# Allegro board MAYAPTRUNG.brd
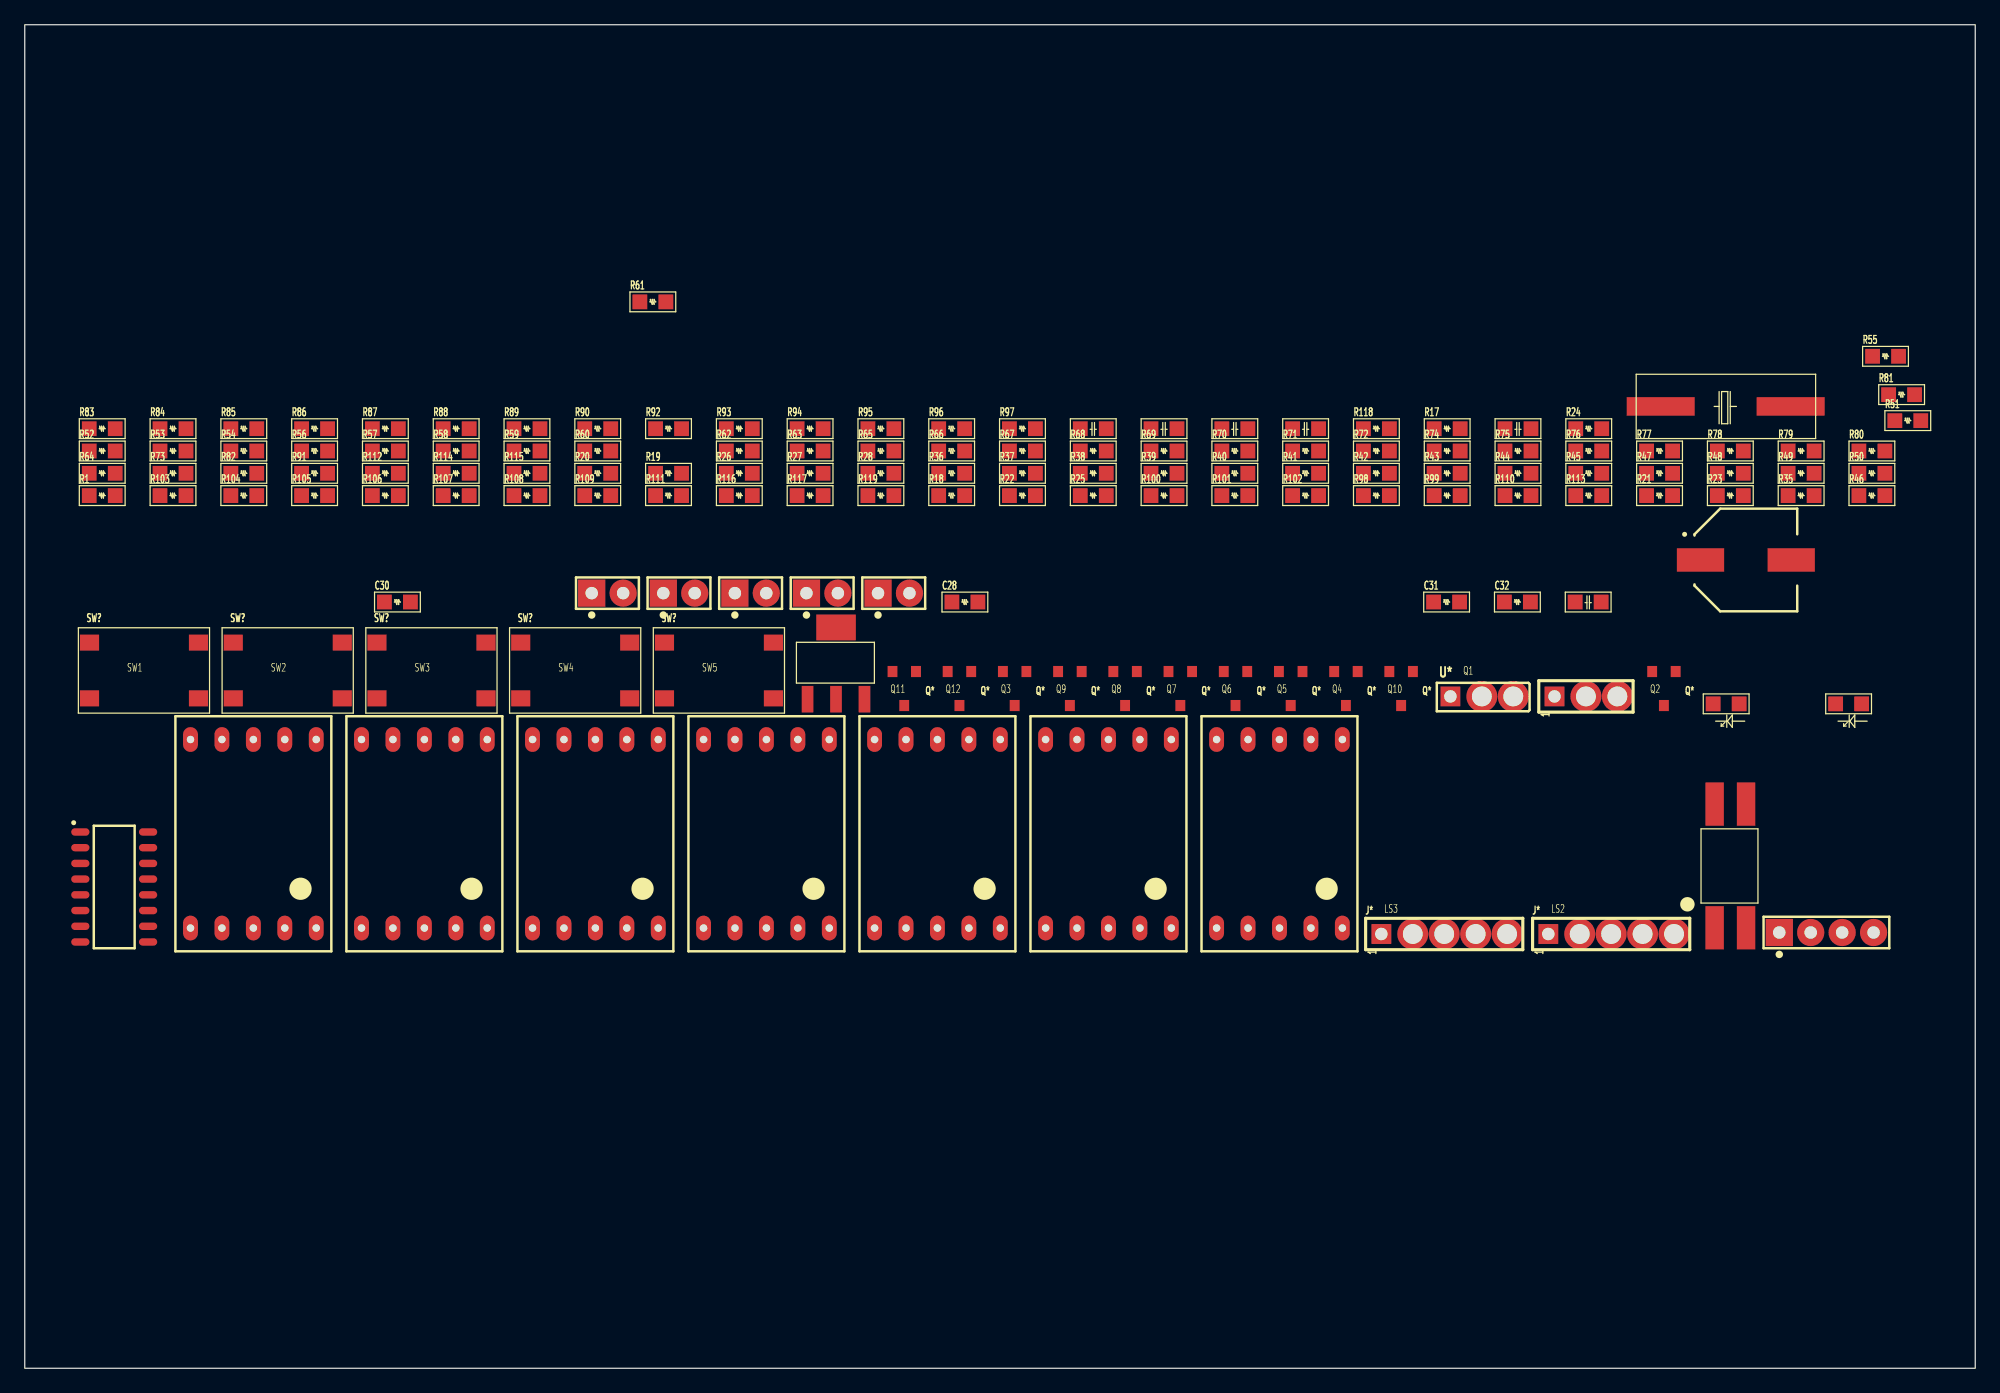
[diagram p0: board, top side]
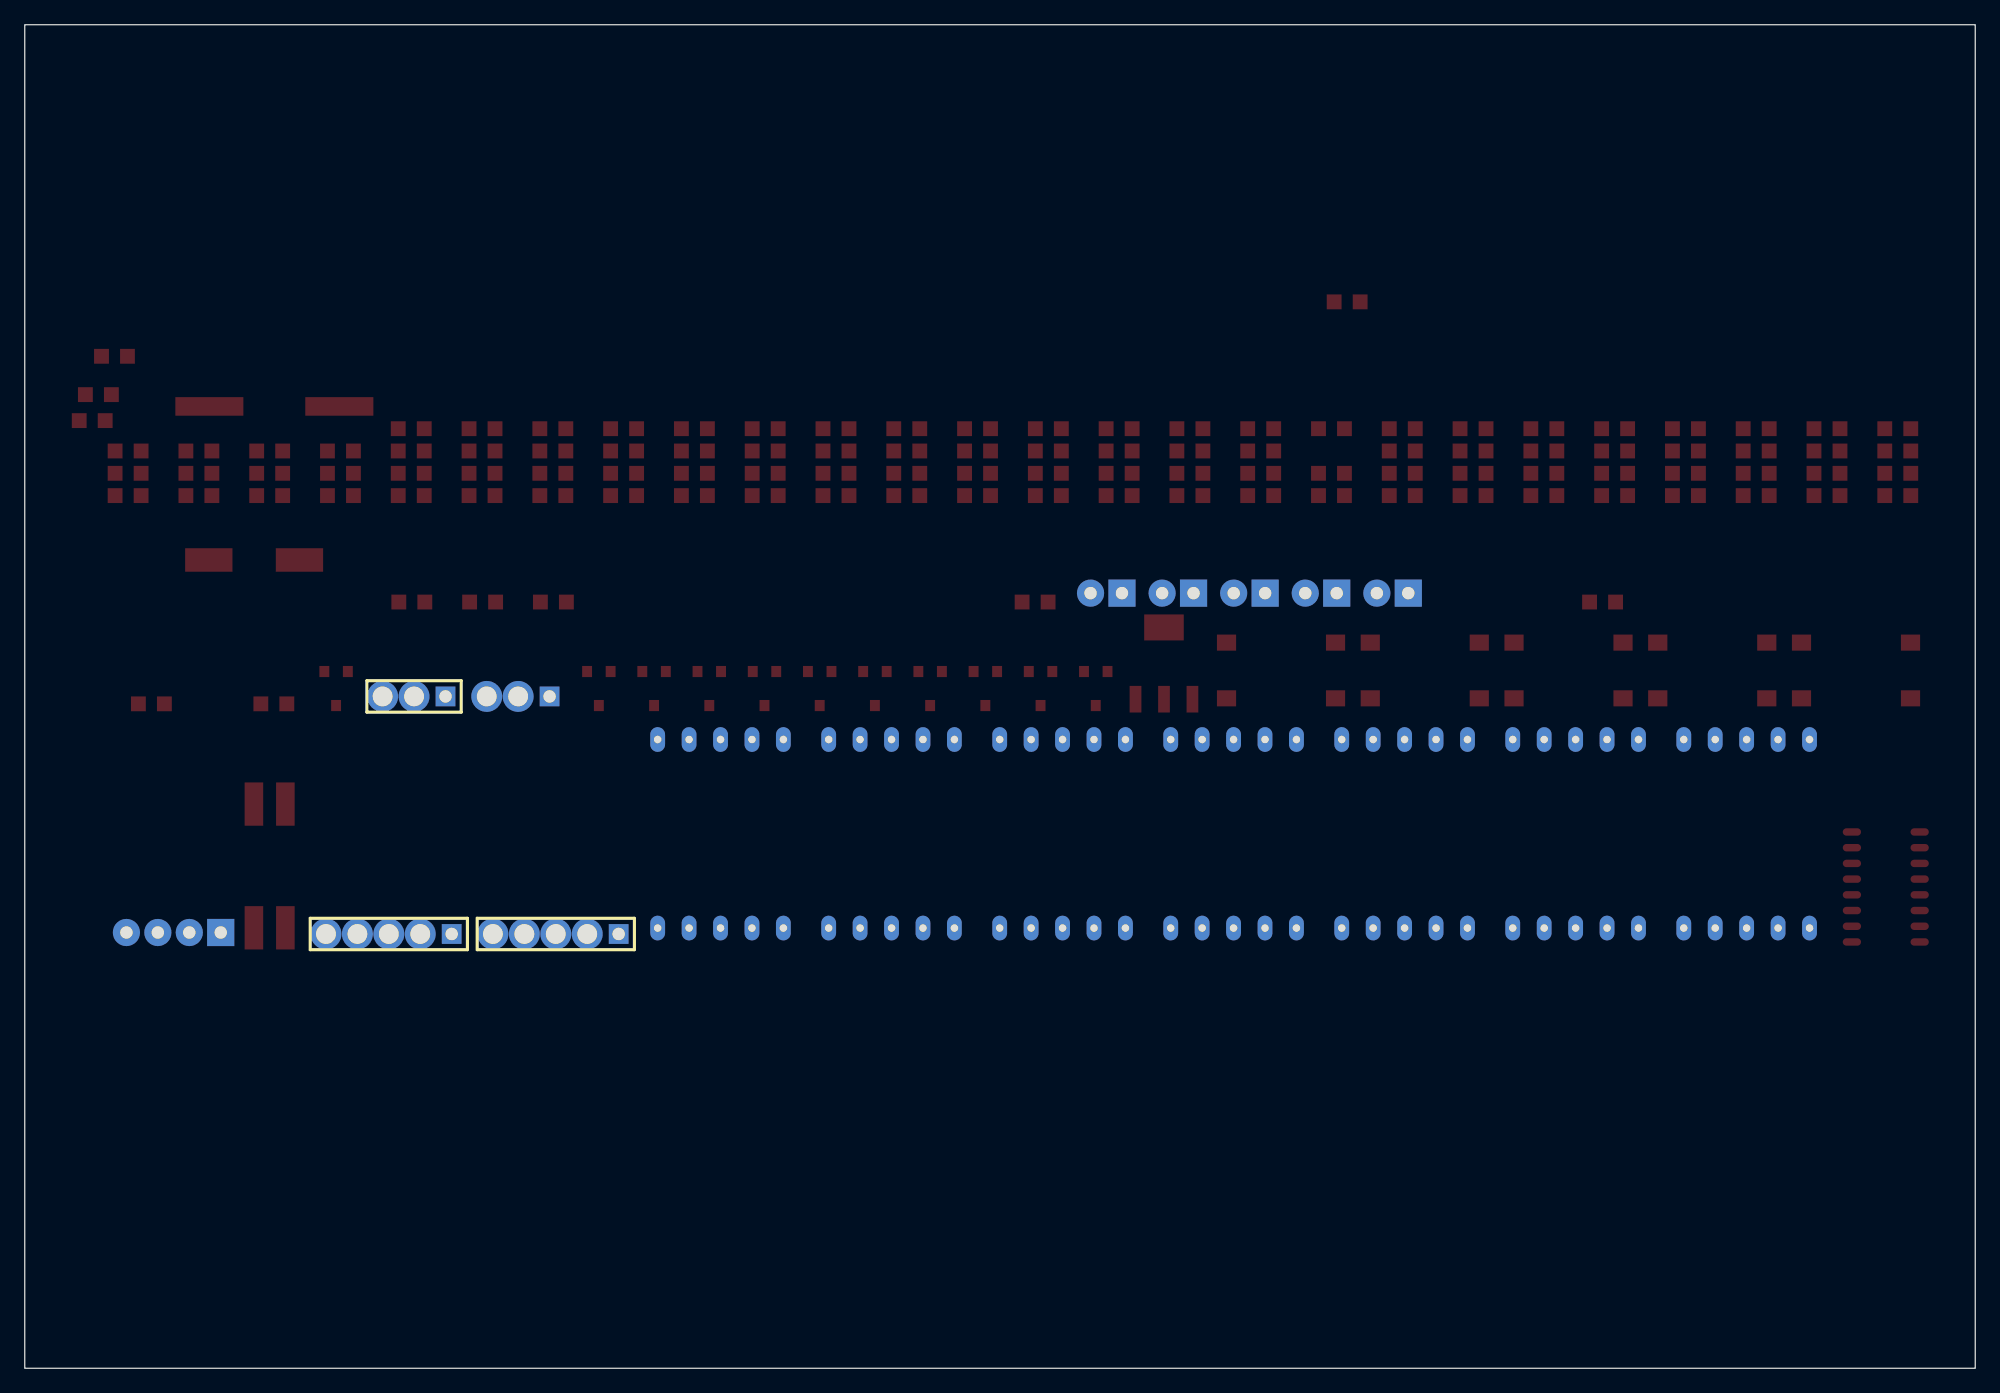
[diagram p1: board, bottom side, seen from below]

Outline 157.6 x 108.6 mm; copper layers: TOP, BOTTOM. Coordinates in mm from the lower left corner of the outline.
Outline path: rectangle 0,0 157.6,108.6

## Design rules (mm)
constraint set DEFAULT: min track width 0.127
net group @@UNNG[0]_164300: nets LED_BUTTON_GROPU.SEGMENT_LEDS.S LED_BUTTON_GROPU.SEGMENT_LEDS_1 LED_BUTTON_GROPU.SEGMENT_LEDS_2 LED_BUTTON_GROPU.SEGMENT_LEDS_3 LED_BUTTON_GROPU.SEGMENT_LEDS_4 LED_BUTTON_GROPU.SEGMENT_LEDS_5 LED_BUTTON_GROPU.SEGMENT_LEDS_6 LED_BUTTON_GROPU.SEGMENT_LEDS_7
net group @@UNNG[0]_168212: nets LED_BUTTON_GROPU.LEDS.LEDS0 LED_BUTTON_GROPU.LEDS.LEDS1 LED_BUTTON_GROPU.LEDS.LEDS2
net group @@UNNG[0]_170267: nets LED_BUTTON_GROPU.LEDS_EN.LEDS_1 LED_BUTTON_GROPU.LEDS_EN.LEDS_2 LED_BUTTON_GROPU.LEDS_EN.LEDS_E
net group LED_BUTTON_GROPU[0..18]: nets LED_BUTTON_GROPU.BUTTONS1 LED_BUTTON_GROPU.BUTTONS2 LED_BUTTON_GROPU.BUTTONS3
net group LED_BUTTON_GROUP[0..18]: nets LED_BUTTON_GROUP.BUTTONS0 LED_BUTTON_GROUP.BUTTONS1 LED_BUTTON_GROUP.BUTTONS2 LED_BUTTON_GROUP.BUTTONS3 LED_BUTTON_GROUP.BUTTONS4 LED_BUTTON_GROUP.LEDS.LEDS0 LED_BUTTON_GROUP.LEDS.LEDS1 LED_BUTTON_GROUP.LEDS.LEDS2 LED_BUTTON_GROUP.LEDS_EN.LEDS_1 LED_BUTTON_GROUP.LEDS_EN.LEDS_2 LED_BUTTON_GROUP.LEDS_EN.LEDS_E LED_BUTTON_GROUP.SEGMENT_LEDS.S LED_BUTTON_GROUP.SEGMENT_LEDS_1 LED_BUTTON_GROUP.SEGMENT_LEDS_2 LED_BUTTON_GROUP.SEGMENT_LEDS_3 LED_BUTTON_GROUP.SEGMENT_LEDS_4 LED_BUTTON_GROUP.SEGMENT_LEDS_5 LED_BUTTON_GROUP.SEGMENT_LEDS_6 LED_BUTTON_GROUP.SEGMENT_LEDS_7
net group POWER[0..5]: nets POWER.3V3 POWER.220V_L POWER.220V_N POWER.GND POWER.ZERO_DETECT_3V3

## Placement (name value [footprint] x y rotation side)
C1  10nF  [CAP_SMD_0805]  119.6 75.95 0 top
C7  1uF  [CAP_SMD_0805]  125.27 61.94 0 top
C20  20pF  [CAP_SMD_0805]  102.44 75.95 0 top
C21  20pF  [CAP_SMD_0805]  96.72 75.95 0 top
C22  100nF  [CAP_SMD_0805]  91 75.95 0 top
C28  0.47uF 250V  [RES_SMD_0805]  74.91 61.94 0 top
C29  470uF  [CAP_SMD_SIZEF]  139.07 65.34 0 top
C30  100nF  [RES_SMD_0805]  29.06 61.94 0 top
C31  100nF  [RES_SMD_0805]  113.84 61.94 0 top
C32  100nF  [RES_SMD_0805]  119.56 61.94 0 top
C33  100nF  [CAP_SMD_0805]  85.28 75.95 0 top
D4  LDS-HTA512RI  [LED7DOAN_14_22]  101.38 43.2 0 top
D9  LED  [LED_SMD_0805]  146.32 53.71 0 top
D11  LDS-HTA512RI  [LED7DOAN_14_22]  73.75 43.2 0 top
D12  LDS-HTA512RI  [LED7DOAN_14_22]  32.29 43.2 0 top
D13  LDS-HTA512RI  [LED7DOAN_14_22]  18.47 43.2 0 top
D14  LDS-HTA512RI  [LED7DOAN_14_22]  59.93 43.2 0 top
D15  LDS-HTA512RI  [LED7DOAN_14_22]  46.11 43.2 0 top
D16  LDS-HTA512RI  [LED7DOAN_14_22]  87.56 43.2 0 top
D19  LED  [LED_SMD_0805]  136.42 53.71 0 top
ISO1  OPTO ISOLATOR-A  [PC817_SMD]  136.54 35.6 0 top
J1  AC220V  [J1_2_254]  45.81 62.66 0 top
J2  SWIM  [J1_4_254]  141.77 35.22 0 top
J3  DHT11  [J1_3_254]  124.87 54.31 0 top
J4  COI BIP  [J1_2_254]  51.59 62.66 0 top
J5  DONG CO  [J1_2_254]  57.38 62.66 0 top
J6  PHUN SUONG  [J1_2_254]  63.16 62.66 0 top
J7  DEN DOT NONG  [J1_2_254]  68.94 62.66 0 top
LS2  RELAY SPDT  [J1_5_254]  124.37 35.1 0 top
LS3  RELAY SPDT  [J1_5_254]  110.88 35.1 0 top
Q1  BTA12  [TO220]  115.19 54.31 0 top
Q2  2SC1815  [SOT-23]  133.39 56.32 0 top
Q3  2SC1815  [SOT-23]  80.93 56.32 0 top
Q4  2SA1015  [SOT-23]  107.7 56.32 0 top
Q5  2SA1015  [SOT-23]  103.24 56.32 0 top
Q6  2SA1015  [SOT-23]  98.78 56.32 0 top
Q7  2SA1015  [SOT-23]  94.32 56.32 0 top
Q8  2SA1015  [SOT-23]  89.86 56.32 0 top
Q9  2SA1015  [SOT-23]  85.4 56.32 0 top
Q10  2SA1015  [SOT-23]  112.16 56.32 0 top
Q11  2SC1815  [SOT-23]  72.01 56.32 0 top
Q12  2SC1815  [SOT-23]  76.47 56.32 0 top
R1  10k  [RES_SMD_0805]  5.21 70.54 0 top
R17  1K  [RES_SMD_0805]  113.88 75.95 0 top
R18  10k  [RES_SMD_0805]  73.84 70.54 0 top
R19  470R  [RES_SMD_0805]  50.97 72.34 0 top
R20  100R  [RES_SMD_0805]  45.25 72.34 0 top
R21  1K  [RES_SMD_0805]  131.04 70.54 0 top
R22  10k  [RES_SMD_0805]  79.56 70.54 0 top
R23  1K  [RES_SMD_0805]  136.76 70.54 0 top
R24  1K  [RES_SMD_0805]  125.32 75.95 0 top
R25  10k  [RES_SMD_0805]  85.28 70.54 0 top
R26  220R  [RES_SMD_0805]  56.69 72.34 0 top
R27  220R  [RES_SMD_0805]  62.41 72.34 0 top
R28  220R  [RES_SMD_0805]  68.13 72.34 0 top
R35  1K  [RES_SMD_0805]  142.48 70.54 0 top
R36  330R  [RES_SMD_0805]  73.84 72.34 0 top
R37  330R  [RES_SMD_0805]  79.56 72.34 0 top
R38  330R  [RES_SMD_0805]  85.28 72.34 0 top
R39  330R  [RES_SMD_0805]  91 72.34 0 top
R40  330R  [RES_SMD_0805]  96.72 72.34 0 top
R41  330R  [RES_SMD_0805]  102.44 72.34 0 top
R42  330R  [RES_SMD_0805]  108.16 72.34 0 top
R43  330R  [RES_SMD_0805]  113.88 72.34 0 top
R44  330R  [RES_SMD_0805]  119.6 72.34 0 top
R45  330R  [RES_SMD_0805]  125.32 72.34 0 top
R46  1K  [RES_SMD_0805]  148.2 70.54 0 top
R47  330R  [RES_SMD_0805]  131.04 72.34 0 top
R48  330R  [RES_SMD_0805]  136.76 72.34 0 top
R49  330R  [RES_SMD_0805]  142.48 72.34 0 top
R50  330R  [RES_SMD_0805]  148.2 72.34 0 top
R51  330R  [RES_SMD_0805]  151.1 76.6 0 top
R52  330R  [RES_SMD_0805]  5.21 74.14 0 top
R53  330R  [RES_SMD_0805]  10.93 74.14 0 top
R54  330R  [RES_SMD_0805]  16.65 74.14 0 top
R55  1K  [RES_SMD_0805]  149.3 81.8 0 top
R56  330R  [RES_SMD_0805]  22.37 74.14 0 top
R57  330R  [RES_SMD_0805]  28.09 74.14 0 top
R58  330R  [RES_SMD_0805]  33.81 74.14 0 top
R59  330R  [RES_SMD_0805]  39.53 74.14 0 top
R60  330R  [RES_SMD_0805]  45.25 74.14 0 top
R61  330R  [RES_SMD_0805]  49.7 86.2 0 top
R62  330R  [RES_SMD_0805]  56.69 74.14 0 top
R63  330R  [RES_SMD_0805]  62.41 74.14 0 top
R64  1K  [RES_SMD_0805]  5.21 72.34 0 top
R65  330R  [RES_SMD_0805]  68.13 74.14 0 top
R66  330R  [RES_SMD_0805]  73.84 74.14 0 top
R67  330R  [RES_SMD_0805]  79.56 74.14 0 top
R68  330R  [RES_SMD_0805]  85.28 74.14 0 top
R69  330R  [RES_SMD_0805]  91 74.14 0 top
R70  330R  [RES_SMD_0805]  96.72 74.14 0 top
R71  330R  [RES_SMD_0805]  102.44 74.14 0 top
R72  330R  [RES_SMD_0805]  108.16 74.14 0 top
R73  1K  [RES_SMD_0805]  10.93 72.34 0 top
R74  330R  [RES_SMD_0805]  113.88 74.14 0 top
R75  330R  [RES_SMD_0805]  119.6 74.14 0 top
R76  330R  [RES_SMD_0805]  125.32 74.14 0 top
R77  330R  [RES_SMD_0805]  131.04 74.14 0 top
R78  330R  [RES_SMD_0805]  136.76 74.14 0 top
R79  330R  [RES_SMD_0805]  142.48 74.14 0 top
R80  330R  [RES_SMD_0805]  148.2 74.14 0 top
R81  330R  [RES_SMD_0805]  150.6 78.7 0 top
R82  1K  [RES_SMD_0805]  16.65 72.34 0 top
R83  330R  [RES_SMD_0805]  5.21 75.95 0 top
R84  330R  [RES_SMD_0805]  10.93 75.95 0 top
R85  330R  [RES_SMD_0805]  16.65 75.95 0 top
R86  330R  [RES_SMD_0805]  22.37 75.95 0 top
R87  330R  [RES_SMD_0805]  28.09 75.95 0 top
R88  330R  [RES_SMD_0805]  33.81 75.95 0 top
R89  330R  [RES_SMD_0805]  39.53 75.95 0 top
R90  330R  [RES_SMD_0805]  45.25 75.95 0 top
R91  1K  [RES_SMD_0805]  22.37 72.34 0 top
R92  330R  [RES_SMD_0805]  50.97 75.95 0 top
R93  330R  [RES_SMD_0805]  56.69 75.95 0 top
R94  330R  [RES_SMD_0805]  62.41 75.95 0 top
R95  330R  [RES_SMD_0805]  68.13 75.95 0 top
R96  330R  [RES_SMD_0805]  73.84 75.95 0 top
R97  330R  [RES_SMD_0805]  79.56 75.95 0 top
R98  100K  [RES_SMD_0805]  108.16 70.54 0 top
R99  100K  [RES_SMD_0805]  113.88 70.54 0 top
R100  100K  [RES_SMD_0805]  91 70.54 0 top
R101  100K  [RES_SMD_0805]  96.72 70.54 0 top
R102  100K  [RES_SMD_0805]  102.44 70.54 0 top
R103  10k  [RES_SMD_0805]  10.93 70.54 0 top
R104  10k  [RES_SMD_0805]  16.65 70.54 0 top
R105  10k  [RES_SMD_0805]  22.37 70.54 0 top
R106  10k  [RES_SMD_0805]  28.09 70.54 0 top
R107  10k  [RES_SMD_0805]  33.81 70.54 0 top
R108  10k  [RES_SMD_0805]  39.53 70.54 0 top
R109  10k  [RES_SMD_0805]  45.25 70.54 0 top
R110  1K  [RES_SMD_0805]  119.6 70.54 0 top
R111  10k  [RES_SMD_0805]  50.97 70.54 0 top
R112  470R 1/2W  [RES_SMD_0805]  28.09 72.34 0 top
R113  1K  [RES_SMD_0805]  125.32 70.54 0 top
R114  10k-10W  [RES_SMD_0805]  33.81 72.34 0 top
R115  100R  [RES_SMD_0805]  39.53 72.34 0 top
R116  10k  [RES_SMD_0805]  56.69 70.54 0 top
R117  10k  [RES_SMD_0805]  62.41 70.54 0 top
R118  1K  [RES_SMD_0805]  108.16 75.95 0 top
R119  10k  [RES_SMD_0805]  68.13 70.54 0 top
SW1  MODE  [6_6_5_SMD_BUTTON]  5.63 58.66 0 top
SW2  MODE  [6_6_5_SMD_BUTTON]  17.24 58.66 0 top
SW3  MODE  [6_6_5_SMD_BUTTON]  28.86 58.66 0 top
SW4  MODE  [6_6_5_SMD_BUTTON]  40.47 58.66 0 top
SW5  MODE  [6_6_5_SMD_BUTTON]  52.09 58.66 0 top
U3  AMS1117  [SOT223]  65.45 56.98 0 top
U4  74HC138  [74HC138_SOIC16]  7.23 38.9 0 top
Y1  16MHz  [CRYSTAL_HC_49]  136.1 77.75 0 top

## Library data of the parts
C1 = CAP NP
C7 = CAP_0
C20-C22 C28-C33 = CAPACITOR NON-POL
D4 D11-D16 = LDS-A32R_1
D9 D19 = LED
ISO1 = OPTO ISOLATOR-A_0
J1 J4-J7 = CON2
J2 = CON4
J3 = CON3
LS2 LS3 = RELAY SPDT
Q1 = TRIAC_0
Q2 Q3 Q11 Q12 = NPN BEC
Q4-Q10 = PNP BEC
R1 R17-R28 R35-R119 = R
SW1-SW5 = SW_TC_SPST
U3 = ASM1117
U4 = 74HC138_0
Y1 = CRYSTAL

## Footprints (pads in the part's own frame, mm; a bottom-side part is the same pattern mirrored in y, then rotated)
6_6_5_SMD_BUTTON
  rect 1.55x1.3 smd: 1(-0.4,0) 2(8.408,0) 3(8.408,-4.504) 4(-0.4,-4.504)
74HC138_SOIC16
  oval 1.475x0.6 smd: 1(-2.737,4.445) 2(-2.737,3.175) 3(-2.737,1.905) 4(-2.737,0.635) 5(-2.737,-0.635) 6(-2.737,-1.905) 7(-2.737,-3.175) 8(-2.737,-4.445) 9(2.737,-4.445) 10(2.737,-3.175) 11(2.737,-1.905) 12(2.737,-0.635) 13(2.737,0.635) 14(2.737,1.905) 15(2.737,3.175) 16(2.737,4.445)
CAP_SMD_0805
  rect 1.2x1.2 smd: 1(0,0) 2(2.1,0)
CAP_SMD_SIZEF
  rect 3.825x1.9 smd: 1(-3.663,0) 2(3.663,0)
CRYSTAL_HC_49
  rect 5.5x1.5 smd: 1(-3.92,0) 2(6.58,0)
J1_2_254
  rect 2.2x2.2 hole 1: 1(0,0)
  round 2.2 hole 1: 2(2.54,0)
J1_3_254
  rect 1.6x1.6 hole 1: 1(-1.27,0)
  round 2.5 hole 1.6: 2(1.27,0) 3(3.81,0)
J1_4_254
  rect 2.2x2.2 hole 1: 1(0,0)
  round 2.2 hole 1: 2(2.54,0) 3(5.08,0) 4(7.62,0)
J1_5_254
  rect 1.6x1.6 hole 1: 1(-1.27,0)
  round 2.5 hole 1.6: 2(1.27,0) 3(3.81,0) 4(6.35,0) 5(8.89,0)
LED7DOAN_14_22
  oval 1.2x2 hole 0.6: 1(-5.08,-7.62) 2(-2.54,-7.62) 3(0,-7.62) 4(2.54,-7.62) 5(5.08,-7.62) 6(5.08,7.62) 7(2.54,7.62) 8(0,7.62) 9(-2.54,7.62) 10(-5.08,7.62)
LED_SMD_0805
  rect 1.2x1.2 smd: 1(0,0) 2(2.1,0)
PC817_SMD
  rect 1.5x3.5 smd: 1(0,0) 2(2.54,0) 3(2.54,10) 4(0,10)
RES_SMD_0805
  rect 1.2x1.2 smd: 1(0,0) 2(2.1,0)
SOT223
  rect 0.95x2.15 smd: 1(-2.201,-2.901) 2(0.099,-2.901) 3(2.399,-2.901)
SOT-23
  rect 0.8x0.9 smd: 1(0,0) 2(-1.9,0) 3(-0.95,-2.75)
TO220
  rect 1.6x1.6 hole 1: 1(0,0)
  round 2.5 hole 1.6: 2(2.54,0) 3(5.08,0)

## Nets
3V3: Q4.2(E) Q5.2(E) Q6.2(E) Q7.2(E) Q8.2(E) Q9.2(E) Q10.2(E) R98.1 R99.1 R100.1 R101.1 R102.1 R103.1 R104.1 R105.1 R106.1 R107.1 R108.1 R109.1 R117.1 U4.16
GND: SW1.2 SW2.2 SW3.2 SW4.2 SW5.2 U4.4 U4.5 U4.8
BEEP_EN: R110.1
DAY0: R82.1 U4.9
DAY1: R91.1 U4.7(Y\7\)
DHT11_DATA: J3.2 R18.2
DONGCO.EN: R24.1
HUM0: R64.1 U4.11
HUM1: R73.1 U4.10
LED_BUTTON_GROPU.BUTTONS1: R98.2 R101.2 SW1.4 SW4.4
LED_BUTTON_GROPU.BUTTONS2: R99.2 R102.2 SW2.4 SW5.4
LED_BUTTON_GROPU.BUTTONS3: R100.2 SW3.4
LED_BUTTON_GROPU.LEDS.LEDS0: R26.2
LED_BUTTON_GROPU.LEDS.LEDS1: R27.2
LED_BUTTON_GROPU.LEDS.LEDS2: R28.2
LED_BUTTON_GROPU.LEDS_EN.LEDS_1: U4.2
LED_BUTTON_GROPU.LEDS_EN.LEDS_2: U4.1
LED_BUTTON_GROPU.LEDS_EN.LEDS_E: U4.3
LED_BUTTON_GROPU.SEGMENT_LEDS.S: R42.2 R51.2 R60.2 R69.2 R78.2 R87.2 R96.2
LED_BUTTON_GROPU.SEGMENT_LEDS_1: R36.2 R44.2 R53.2 R62.2 R71.2 R80.2 R89.2
LED_BUTTON_GROPU.SEGMENT_LEDS_2: R41.2 R50.2 R59.2 R68.2 R77.2 R86.2 R95.2
LED_BUTTON_GROPU.SEGMENT_LEDS_3: R40.2 R49.2 R58.2 R67.2 R76.2 R85.2 R94.2
LED_BUTTON_GROPU.SEGMENT_LEDS_4: R39.2 R48.2 R57.2 R66.2 R75.2 R84.2 R93.2
LED_BUTTON_GROPU.SEGMENT_LEDS_5: R43.2 R52.2 R61.2 R70.2 R79.2 R88.2 R97.2
LED_BUTTON_GROPU.SEGMENT_LEDS_6: R37.2 R45.2 R54.2 R63.2 R72.2 R81.2 R90.2
LED_BUTTON_GROPU.SEGMENT_LEDS_7: R38.2 R47.2 R56.2 R65.2 R74.2 R83.2 R92.2
OSC1: C20.2 Y1.2
OSC2: C21.2 Y1.1
PHUNSUONG.EN: R118.1
POWER.3V3: C30.1 C31.1 C32.1 J2.1 J3.1 R1.1 R17.1 R18.1 R20.1 R21.1 R116.1 U3.2(VOUT)
POWER.220V_L: C22.1 C29.1 C33.1 J4.1 LS2.1 LS2.3 LS3.1 LS3.3 Q1.1 R113.1 U3.3
POWER.220V_N: J1.1 J5.2 J6.2 J7.2 R112.1
POWER.GND: C1.2 C7.2 C20.1 C21.1 C29.2 C30.2 C31.2 C32.2 D19.1(CATHODE) ISO1.3(EMITTER) J2.3 J3.3 Q2.2(E) Q3.2(E) Q11.2(E) Q12.2(E) R22.2 R25.2 R111.2 R119.2 U3.1
RESET: C1.1 J2.4 R1.2
SWIM: J2.2 R17.2
TEMP0: R35.1 U4.14
TEMP1: R46.1 U4.13
TEMP2: R55.1 U4.12
TRIAC.EN: R23.1
ZERO_DETECT: ISO1.4 R116.2
N72167: C7.1
N145456: D4.3 D4.8 Q4.3
N145714: Q4.1 R35.2 R103.2
N145844: D4.5 R36.1
N146030: D4.7 R43.1
N146034: D4.6 R42.1
N146038: D4.4 R41.1
N146042: D4.2 R40.1
N146046: D4.1 R39.1
N146050: D4.9 R38.1
N146060: D4.10(G) R37.1
N146609: D11.5 R44.1
N146669: D11.10(G) R45.1
N146685: Q5.1 R46.2 R104.2
N146705: D11.9 R47.1
N146715: D11.3 D11.8 Q5.3
N146739: D11.1 R48.1
N146765: D11.2 R49.1
N146791: D11.4 R50.1
N146817: D11.6 R51.1
N146843: D11.7 R52.1
N147246: D12.5 R53.1
N147306: D12.10(G) R54.1
N147322: Q6.1 R55.2 R105.2
N147342: D12.9 R56.1
N147352: D12.3 D12.8 Q6.3
N147376: D12.1 R57.1
N147402: D12.2 R58.1
N147428: D12.4 R59.1
N147454: D12.6 R60.1
N147480: D12.7 R61.1
N147906: D13.5 R62.1
N147966: D13.10(G) R63.1
N147982: Q8.1 R64.2 R107.2
N148002: D13.9 R65.1
N148012: D13.3 D13.8 Q8.3
N148036: D13.1 R66.1
N148062: D13.2 R67.1
N148088: D13.4 R68.1
N148114: D13.6 R69.1
N148140: D13.7 R70.1
N148561: D14.5 R71.1
N148621: D14.10(G) R72.1
N148637: Q7.1 R73.2 R106.2
N148657: D14.9 R74.1
N148667: D14.3 D14.8 Q7.3
N148691: D14.1 R75.1
N148717: D14.2 R76.1
N148743: D14.4 R77.1
N148769: D14.6 R78.1
N148795: D14.7 R79.1
N149239: D15.5 R80.1
N149299: D15.10(G) R81.1
N149315: Q9.1 R82.2 R108.2
N149335: D15.9 R83.1
N149345: D15.3 D15.8 Q9.3
N149369: D15.1 R84.1
N149395: D15.2 R85.1
N149421: D15.4 R86.1
N149447: D15.6 R87.1
N149473: D15.7 R88.1
N149912: D16.5 R89.1
N149972: D16.10(G) R90.1
N149988: Q10.1 R91.2 R109.2
N150008: D16.9 R92.1
N150018: D16.3 D16.8 Q10.3
N150042: D16.1 R93.1
N150068: D16.2 R94.1
N150094: D16.4 R95.1
N150120: D16.6 R96.1
N150146: D16.7 R97.1
N153159: C28.2
N153566: J1.2
N153646: R114.1
N153702: ISO1.2
N154063: R114.2 R115.1
N154210: ISO1.1 R115.2
N163843: R117.2 U4.6
N187788: J5.1 LS2.4(NO)
N187814: C22.2 LS2.2 Q3.3
N187898: Q3.1 R24.2 R25.1
N190996: J6.1 LS3.4(NO)
N191026: C33.2 LS3.2 Q12.3
N191110: Q12.1 R118.2 R119.1
N192170: Q1.3(GATE) R19.2
N192178: J7.1 Q1.2
N192182: D9.1(CATHODE) Q2.3
N192258: R19.1
N192268: Q2.1 R22.1 R23.2
N200030: Q11.1 R110.2 R111.1
N1406843: SW1.3
N1408451: R26.1
N1408611: R27.1
N1408771: R28.1
N1506413: SW2.3
N1508483: SW3.3
N1510633: SW4.3
N1512703: SW5.3
N1531240: C28.1 R112.2
N1533831: D19.2 R113.2
N1920941: D9.2 R21.2
N1921621: R20.2
N1999841: J4.2 Q11.3

Pads without a net: LS2 5; LS3 5; SW1 1; SW2 1; SW3 1; SW4 1; SW5 1; U4 15

## Copper pours and planes (outline as drawn; the poured copper is in the pictures)
Net_1 on TOP (solid shape): 67.15,58.83 63.95,58.83 63.95,60.93 67.15,60.93
